# EAGLE board Tugas Day 0- Qurrata Choir Marham (EAGLE 7.5.0)
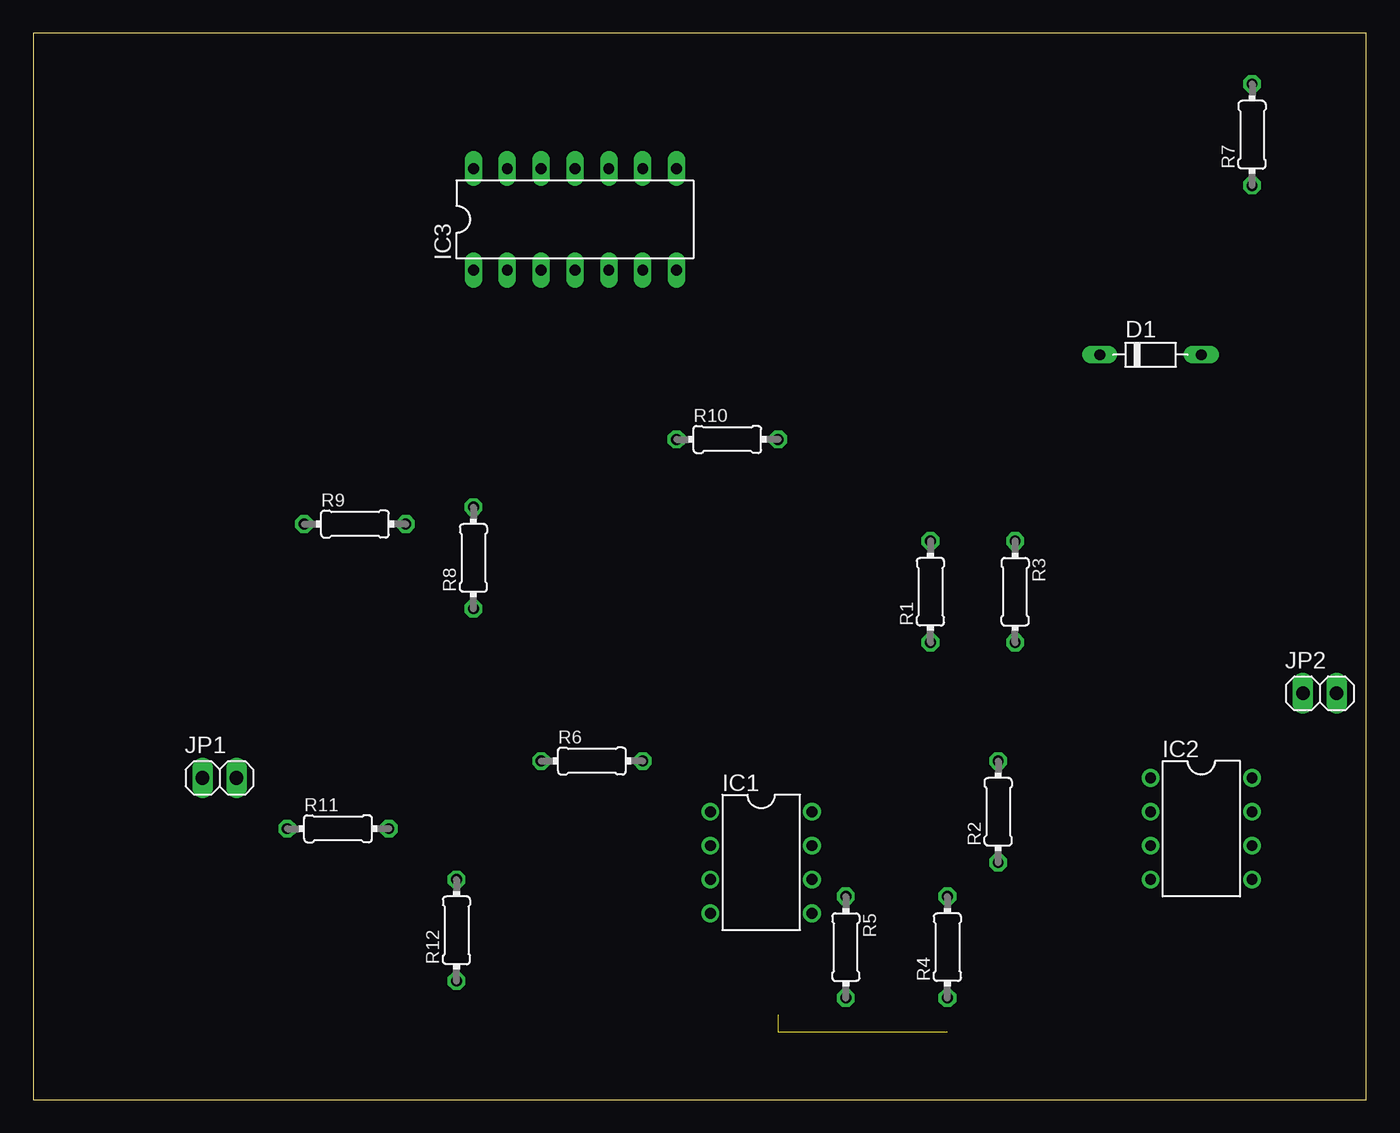
[diagram p0: board, top side]
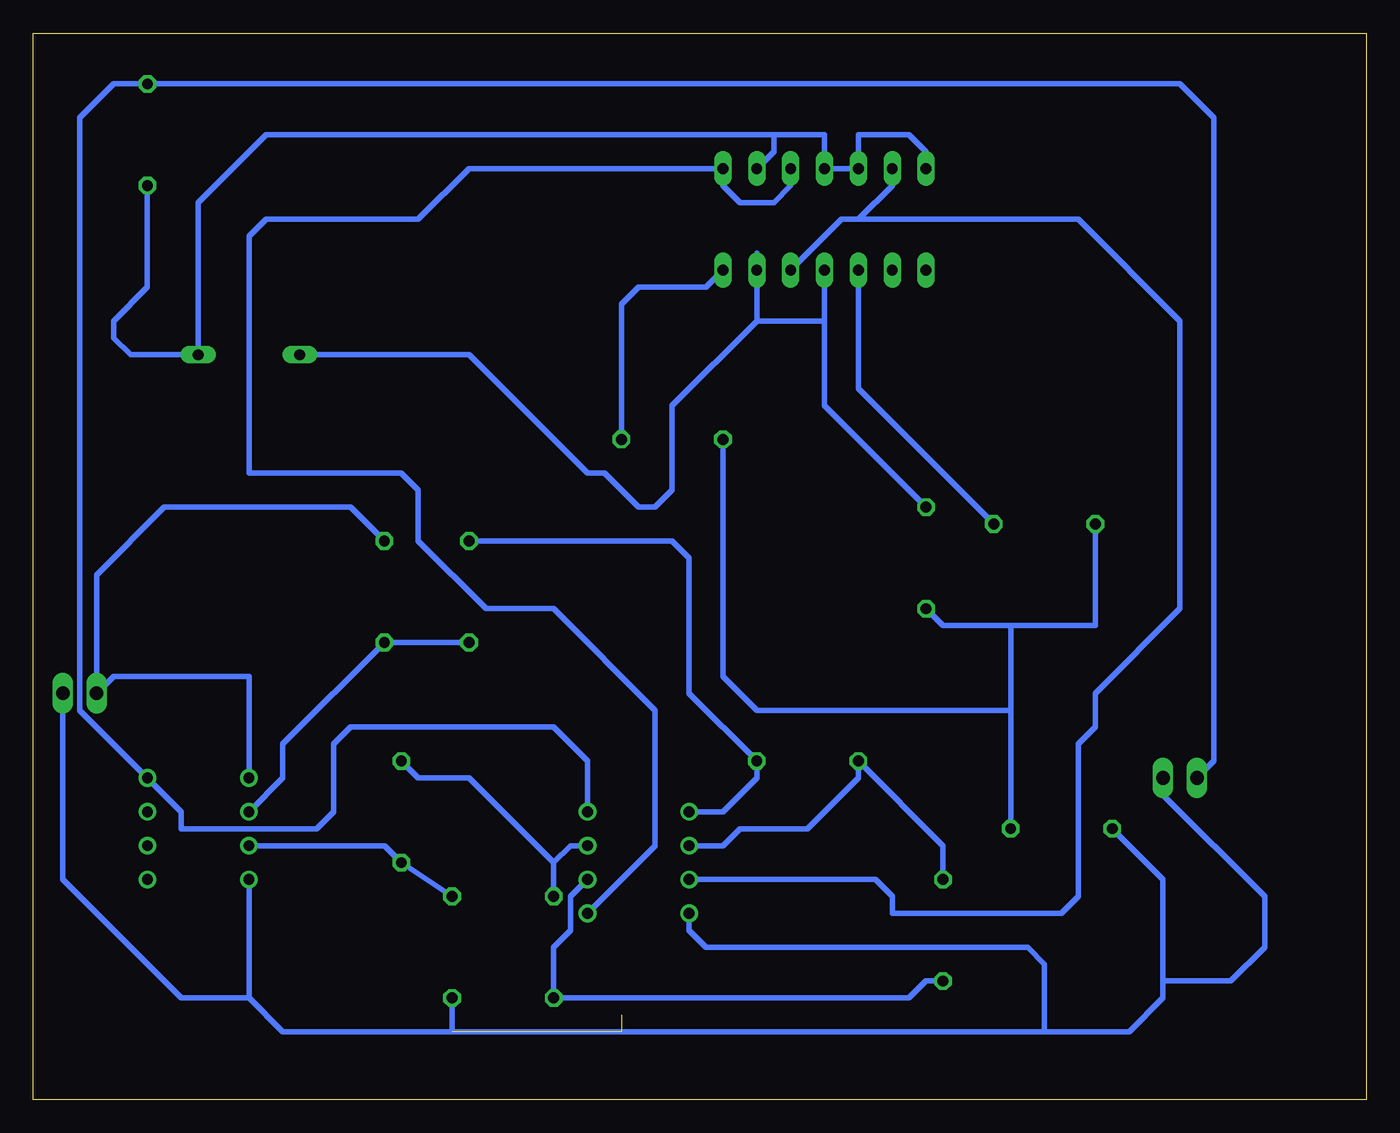
[diagram p1: board, bottom side, seen from below]

Size 100 x 80 mm. Coordinates in mm from the lower left corner, seen from the top.
Outline: 0,0 100,0 100,80 0,80 0,0
Copper layers (1*16): Top 0.035mm / dielectric 1.5mm / Bottom 0.035mm
Design rules "default": minimum track width 10mil, minimum drill 24mil, track to track 8mil, track to pad 8mil, pad to pad 8mil, via to via 8mil, smd to smd 8mil, copper to edge 40mil, drill to drill 8mil, minimum pad ring 10mil, minimum via ring 8mil, stop-mask expansion 4mil, vias tented up to drill 0mil, thermal gap 10mil

## Footprints (pad centres in the part's own frame; a part is rotated, then mirrored left to right if it is on the bottom)
D-7.5 = drill 0.813 long: A 3.81,0; C -3.81,0
DIL08 = drill 0.813 pad 1.27: 1 -3.81,-3.81; 2 -1.27,-3.81; 3 1.27,-3.81; 4 3.81,-3.81; 5 3.81,3.81; 6 1.27,3.81; 7 -1.27,3.81; 8 -3.81,3.81
DIL14 = drill 0.813 long: 1 -7.62,-3.81; 2 -5.08,-3.81; 3 -2.54,-3.81; 4 0,-3.81; 5 2.54,-3.81; 6 5.08,-3.81; 7 7.62,-3.81; 8 7.62,3.81; 9 5.08,3.81; 10 2.54,3.81; 11 0,3.81; 12 -2.54,3.81; 13 -5.08,3.81; 14 -7.62,3.81
1X02 = drill 1.016 long: 1 -1.27,0; 2 1.27,0
0204/7 = drill 0.813 octagon: 1 -3.81,0; 2 3.81,0

## Placement (x,y rotation side)
D1  [D-7.5]  83.82,55.88 0 top
IC1  LM358N  [DIL08]  54.61,17.78 270 top
IC2  LM358N  [DIL08]  87.63,20.32 270 top
IC3  [DIL14]  40.64,66.04 0 top
JP1  [1X02]  13.97,24.13 0 top
JP2  [1X02]  96.52,30.48 0 top
R1  100k  [0204/7]  67.31,38.1 90 top
R2  100k  [0204/7]  72.39,21.59 90 top
R3  100k  [0204/7]  73.66,38.1 270 top
R4  100k  [0204/7]  68.58,11.43 90 top
R5  100k  [0204/7]  60.96,11.43 270 top
R6  100k  [0204/7]  41.91,25.4 0 top
R7  60k  [0204/7]  91.44,72.39 90 top
R8  12k  [0204/7]  33.02,40.64 90 top
R9  100k  [0204/7]  24.13,43.18 0 top
R10  200k  [0204/7]  52.07,49.53 0 top
R11  60k  [0204/7]  22.86,20.32 0 top
R12  1k  [0204/7]  31.75,12.7 90 top

## Library data of the parts
D1 = diode
IC1 IC2 = linear
IC3 = ic-package
JP1 JP2 = pinhead
R1-R12 = rcl

## Nets
GND: IC1.4 IC2.4 JP1.2 JP2.2 R4.1 R11.1
N$1: D1.A IC3.9 IC3.11 IC3.12 IC3.14 R7.1
N$2: D1.C IC3.4 IC3.6 R8.2
N$3: IC3.3 R9.2
N$4: IC3.7 R10.2
N$5: R8.1 R9.1 R10.1 R11.2
N$6: IC1.3 IC3.5 IC3.13
N$7: IC1.5 IC3.8 IC3.10
N$8: IC1.1 R1.2 R6.2
N$10: IC1.6 R5.2 R12.1
N$11: IC1.7 R2.2 R5.1
N$12: IC1.2 R6.1 R12.2
N$14: IC2.2 R1.1 R3.2
N$15: IC2.3 R2.1 R4.2
VCC: IC1.8 IC2.8 JP1.1 R7.2
VOUT: IC2.1 JP2.1 R3.1

## Tracks (layer width: path | path; a pad name or v marks a point on that pad's centre or on a via)
GND  (2 unrouted)
  Bottom 0.406: R11.1 15.24,16.51 15.24,8.89 | 15.24,8.89 15.24,7.62 17.78,5.08 24.13,5.08 | 24.13,5.08 68.58,5.08 | 68.58,5.08 81.28,5.08 83.82,7.62 | IC2.4 83.82,7.62 | JP2.2 97.79,16.51 88.9,7.62 83.82,7.62 | 15.24,8.89 10.16,8.89 7.62,11.43 7.62,15.24 15.24,22.86 JP1.2 | R4.1 68.58,5.08 | IC1.4 50.8,12.7 49.53,11.43 25.4,11.43 24.13,10.16 24.13,5.08
N$1
  Bottom 0.406: R7.1 91.44,60.96 93.98,58.42 93.98,57.15 92.71,55.88 D1.A 87.63,67.31 82.55,72.39 44.45,72.39 | IC3.14 33.02,71.12 34.29,72.39 38.1,72.39 IC3.12 IC3.11 40.64,72.39 44.45,72.39 | 44.45,72.39 44.45,71.12 IC3.9
N$2
  Bottom 0.406: IC3.4 40.64,58.42 | 40.64,58.42 45.72,58.42 | 45.72,58.42 IC3.6 45.72,63.5 | 45.72,58.42 52.07,52.07 52.07,45.72 53.34,44.45 54.61,44.45 57.15,46.99 58.42,46.99 67.31,55.88 D1.C | R8.2 40.64,52.07 40.64,58.42
N$3
  Bottom 0.406: R9.2 38.1,53.34 IC3.3
N$4
  Bottom 0.406: R10.2 55.88,59.69 54.61,60.96 49.53,60.96 IC3.7
N$5
  Bottom 0.406: 26.67,29.21 R11.2 | R9.1 20.32,35.56 26.67,35.56 | R10.1 48.26,31.75 45.72,29.21 26.67,29.21 | 26.67,35.56 31.75,35.56 R8.1 | 26.67,29.21 26.67,35.56
N$6
  Bottom 0.406: IC3.13 35.56,68.58 38.1,66.04 | 38.1,66.04 39.37,66.04 IC3.5 | IC1.3 36.83,16.51 35.56,15.24 35.56,13.97 22.86,13.97 21.59,15.24 21.59,26.67 20.32,27.94 20.32,30.48 13.97,36.83 13.97,58.42 21.59,66.04 38.1,66.04
N$7
  Bottom 0.406: IC1.5 53.34,19.05 53.34,29.21 60.96,36.83 66.04,36.83 71.12,41.91 71.12,45.72 72.39,46.99 83.82,46.99 83.82,64.77 82.55,66.04 71.12,66.04 67.31,69.85 IC3.8 48.26,68.58 46.99,67.31 44.45,67.31 43.18,68.58 IC3.10
N$8
  Bottom 0.406: R1.2 52.07,41.91 50.8,40.64 50.8,30.48 R6.2 45.72,24.13 48.26,21.59 IC1.1
N$10
  Bottom 0.406: R12.1 33.02,8.89 34.29,7.62 R5.2 60.96,11.43 59.69,12.7 59.69,15.24 IC1.6
N$11
  Bottom 0.406: IC1.7 59.69,19.05 60.96,17.78 | R5.1 60.96,17.78 | 60.96,17.78 67.31,24.13 71.12,24.13 R2.2
N$12
  Bottom 0.406: R12.2 31.75,19.05 R6.1 38.1,24.13 41.91,20.32 46.99,20.32 48.26,19.05 IC1.2
N$14
  Bottom 0.406: R1.1 R3.2 81.28,26.67 81.28,24.13 IC2.2
N$15
  Bottom 0.406: R4.2 R2.1 73.66,19.05 IC2.3
VCC
  Bottom 0.406: IC1.8 58.42,25.4 60.96,27.94 76.2,27.94 77.47,26.67 77.47,21.59 78.74,20.32 88.9,20.32 88.9,21.59 IC2.8 96.52,29.21 96.52,73.66 93.98,76.2 R7.2 87.63,76.2 86.36,76.2 13.97,76.2 11.43,73.66 11.43,25.4 JP1.1
VOUT
  Bottom 0.406: R3.1 76.2,44.45 90.17,44.45 95.25,39.37 JP2.1 93.98,31.75 83.82,31.75 IC2.1